# EAGLE board shared_pcb (EAGLE 7.5.0)
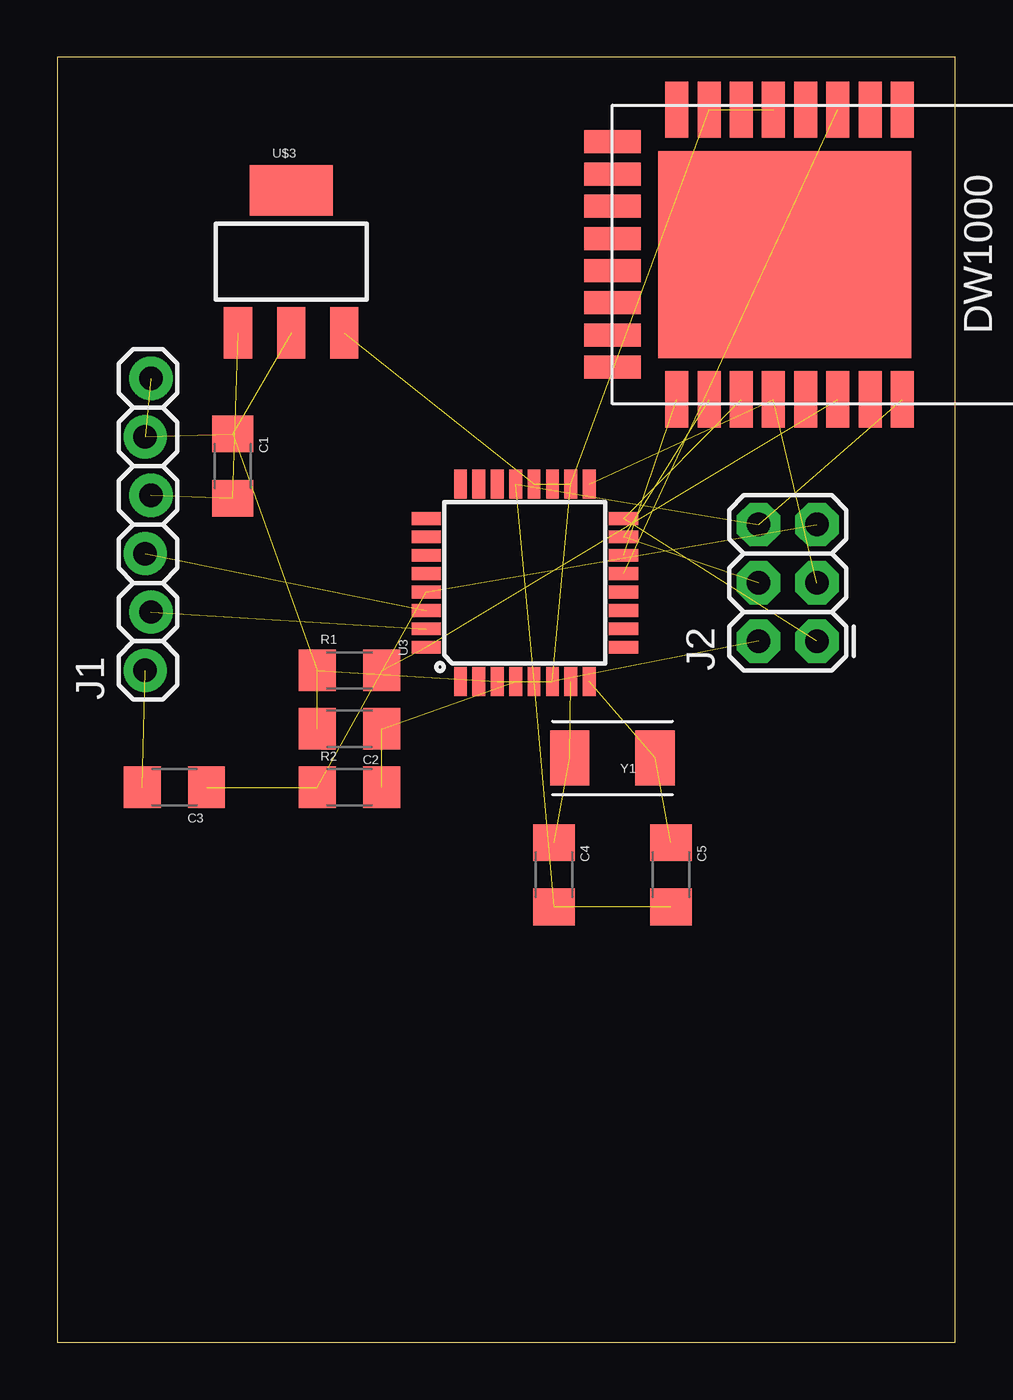
[diagram p0: board, top side]

Size 39.04 x 55.87 mm. Coordinates in mm from the lower left corner, seen from the top.
Outline: 0,0 39.04,0 39.04,55.87 0,55.87 0,0
Copper layers (1*16): Top 0.035mm / dielectric 1.5mm / Bottom 0.035mm
Design rules "default": minimum track width 10mil, minimum drill 24mil, track to track 8mil, track to pad 8mil, pad to pad 8mil, via to via 8mil, smd to smd 8mil, copper to edge 40mil, drill to drill 8mil, minimum pad ring 10mil, minimum via ring 8mil, stop-mask expansion 4mil, vias tented up to drill 0mil, thermal gap 10mil

## Footprints (pad centres in the part's own frame; a part is rotated, then mirrored left to right if it is on the bottom)
1206 = smd 1.6 x 1.8: 1 -1.4,0; 2 1.4,0
1X06_LOCK = drill 1.016 pad 1.88: 1 0,0; 2 2.54,-0.254; 3 5.08,0; 4 7.62,-0.254; 5 10.16,0; 6 12.7,-0.254
2X3 = drill 1.016 pad 1.88 octagon: 1 0,0; 2 0,2.54; 3 2.54,0; 4 2.54,2.54; 5 5.08,0; 6 5.08,2.54
TQFP32-08 = smd 1.27 x 0.559: 1 -4.293,2.8; 2 -4.293,2; 3 -4.293,1.2; 4 -4.293,0.4; 5 -4.293,-0.4; 6 -4.293,-1.2; 7 -4.293,-2; 8 -4.293,-2.8; 17 4.293,-2.8; 18 4.293,-2; 19 4.293,-1.2; 20 4.293,-0.4; 21 4.293,0.4; 22 4.293,1.2; 23 4.293,2; 24 4.293,2.8 | smd 0.559 x 1.27: 9 -2.8,-4.293; 10 -2,-4.293; 11 -1.2,-4.293; 12 -0.4,-4.293; 13 0.4,-4.293; 14 1.2,-4.293; 15 2,-4.293; 16 2.8,-4.293; 25 2.8,4.293; 26 2,4.293; 27 1.2,4.293; 28 0.4,4.293; 29 -0.4,4.293; 30 -1.2,4.293; 31 -2,4.293; 32 -2.8,4.293
DWM1000 = smd 2.45 x 1: EXTON -2.8,12.6; GPIO7 -2.8,8.4; IRQ/GPIO8 9.8,9.8; RST -2.8,9.8; SPICLK 9.8,7; SPICSN 9.8,2.8; SPIMISO 9.8,5.6; SPIMOSI 9.8,4.2; VDD3V3 -2.8,4.2; VDD3V3.2 -2.8,5.6; VDDAON -2.8,7; VSS -2.8,2.8; VSS.2 9.8,12.6; VSS.3 9.8,11.2; VSS.4 9.8,8.4; WAKEUP -2.8,11.2 | smd 9 x 11: GND 3.5,7.5 | smd 1 x 2.45: GPIO0 7,0; GPIO1 5.6,0; GPIO2 4.2,0; GPIO3 2.8,0; GPIO4 1.4,0; GPIO5 0,0; GPIO6 -1.4,0; VSS.5 8.4,0
SOT223 = smd 1.219 x 2.235: 1 -2.311,-3.099; 2 0,-3.099; 3 2.311,-3.099 | smd 3.6 x 2.2: 4 0,3.099
CRYSTAL-TXC-7A = smd 1.7 x 2.4: P$1 1.85,0; P$2 -1.85,0

## Placement (x,y rotation side)
C1  1uF  [1206]  7.62,38.1 270 top
C2  2.2uF  [1206]  12.7,26.67 180 top
C3  100nF  [1206]  5.08,24.13 180 top
C4  18pF  [1206]  21.59,20.32 270 top
C5  18pF  [1206]  26.67,20.32 270 top
J1  [1X06_LOCK]  3.81,29.21 90 top
J2  AVR_SPI_PRG_6PTH  [2X3]  33.02,30.48 90 top
R1  10K  [1206]  12.7,29.21 0 top
R2  10K  [1206]  12.7,24.13 0 top
U3  ATMEGA328P_TQFP  [TQFP32-08]  20.32,33.02 90 top
U$1  DWM1000  [DWM1000]  24.13,50.8 270 top
U$3  V_REG_MIC5209 (3.3V)  [SOT223]  10.16,46.99 0 top
Y1  8MHz  [CRYSTAL-TXC-7A]  24.13,25.4 180 top

## Library data of the parts
C1-C5 = SparkFun-Capacitors
J1 J2 = SparkFun-Connectors
R1 R2 = SparkFun-Passives
U3 = SparkFun-DigitalIC; PROD_ID: IC-09069
U$1 = DWM1000
U$3 = SparkFun-PowerIC
Y1 = SparkFun-FreqCtrl

## Nets
CHIP_RST: C3.1 J2.5 R2.1 U3.29
CLK: J2.3 U3.17 U$1.SPICLK
CSN: U3.14 U$1.SPICSN
DW_RST: U3.13 U$1.RST
GND: C1.1 C2.2 C4.2 C5.2 J1.5 J1.6 J2.6 R1.1 U3.3 U3.5 U3.21 U$1.VSS.2 U$3.2
IRQ: R1.2 U3.32 U$1.IRQ/GPIO8
MISO: J2.1 U3.16 U$1.SPIMISO
MOSI: J2.4 U3.15 U$1.SPIMOSI
N$3: C3.2 J1.1
N$6: C4.1 U3.7 Y1.P$1
N$7: C5.1 U3.8 Y1.P$2
RXD: J1.3 U3.30
TXD: J1.2 U3.31
VCC: C2.1 J2.2 R2.2 U3.4 U3.6 U3.18 U3.20 U$1.VDD3V3 U$1.VDDAON U$3.3
VIN: C1.2 J1.4 U$3.1

## Tracks (layer width: path | path; a pad name or v marks a point on that pad's centre or on a via)
CHIP_RST  (3 unrouted)
CLK  (2 unrouted)
CSN  (1 unrouted)
DW_RST  (1 unrouted)
GND  (12 unrouted)
IRQ  (2 unrouted)
MISO  (2 unrouted)
MOSI  (2 unrouted)
N$3  (1 unrouted)
N$6  (2 unrouted)
N$7  (2 unrouted)
RXD  (1 unrouted)
TXD  (1 unrouted)
VCC  (9 unrouted)
  Top 0.254: C2.1 13.97,26.67
VIN  (2 unrouted)